# Altium PCB Ver1.PcbDoc
Units mm, origin at the board's own origin, x right, y up, seen from the top; angles counter-clockwise.
Board outline 50 x 50 mm, 2 copper layers (Top Layer, Bottom Layer); 33 components, 34 nets, 202 pads, 35 vias.
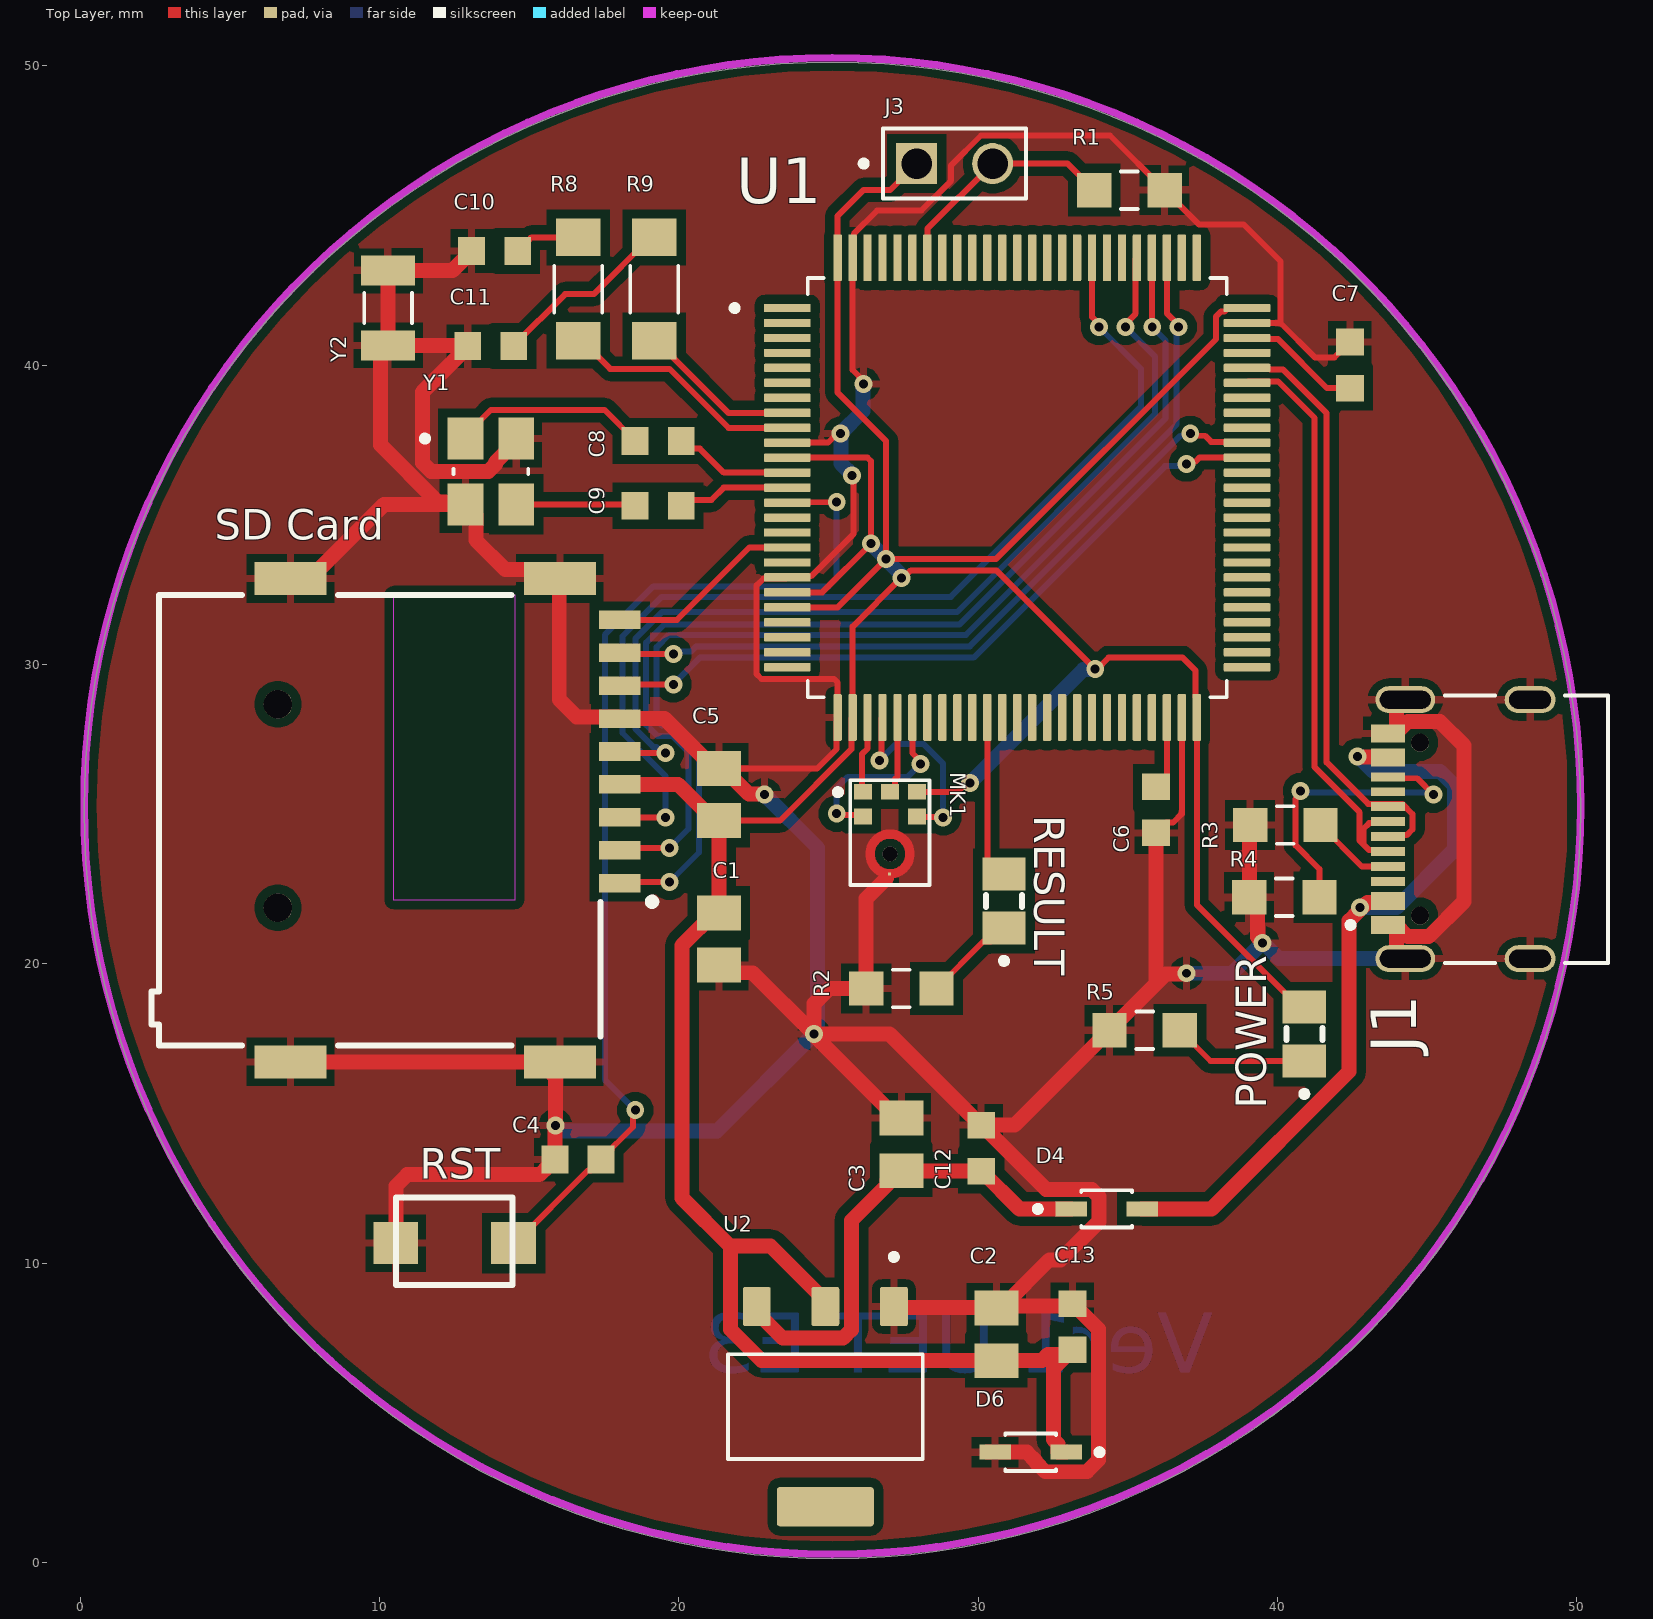
[diagram p0: Top Layer view]
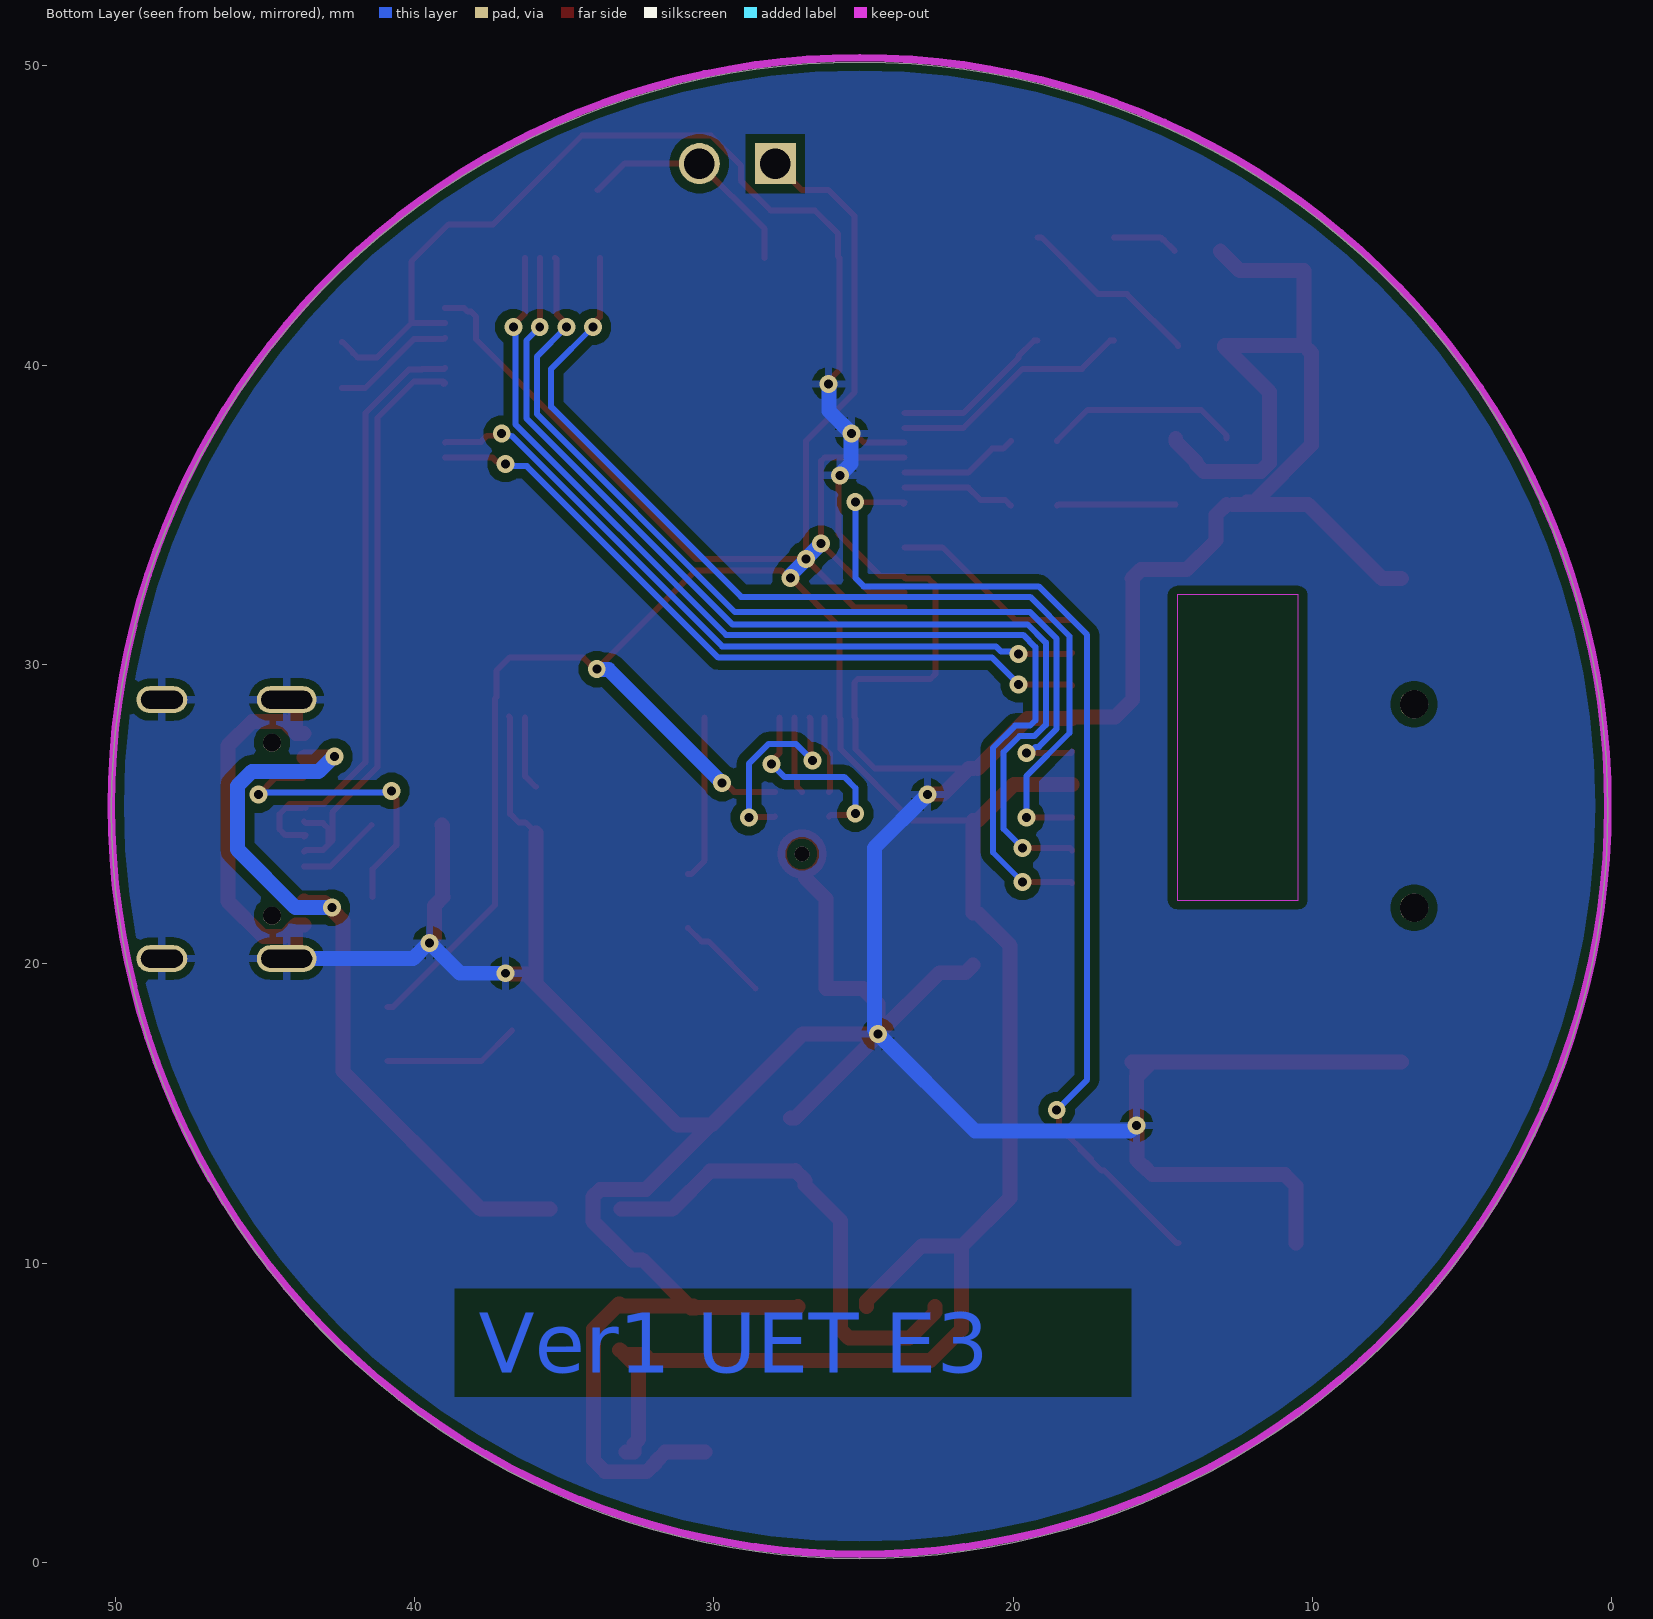
[diagram p1: Bottom Layer view, seen from below]
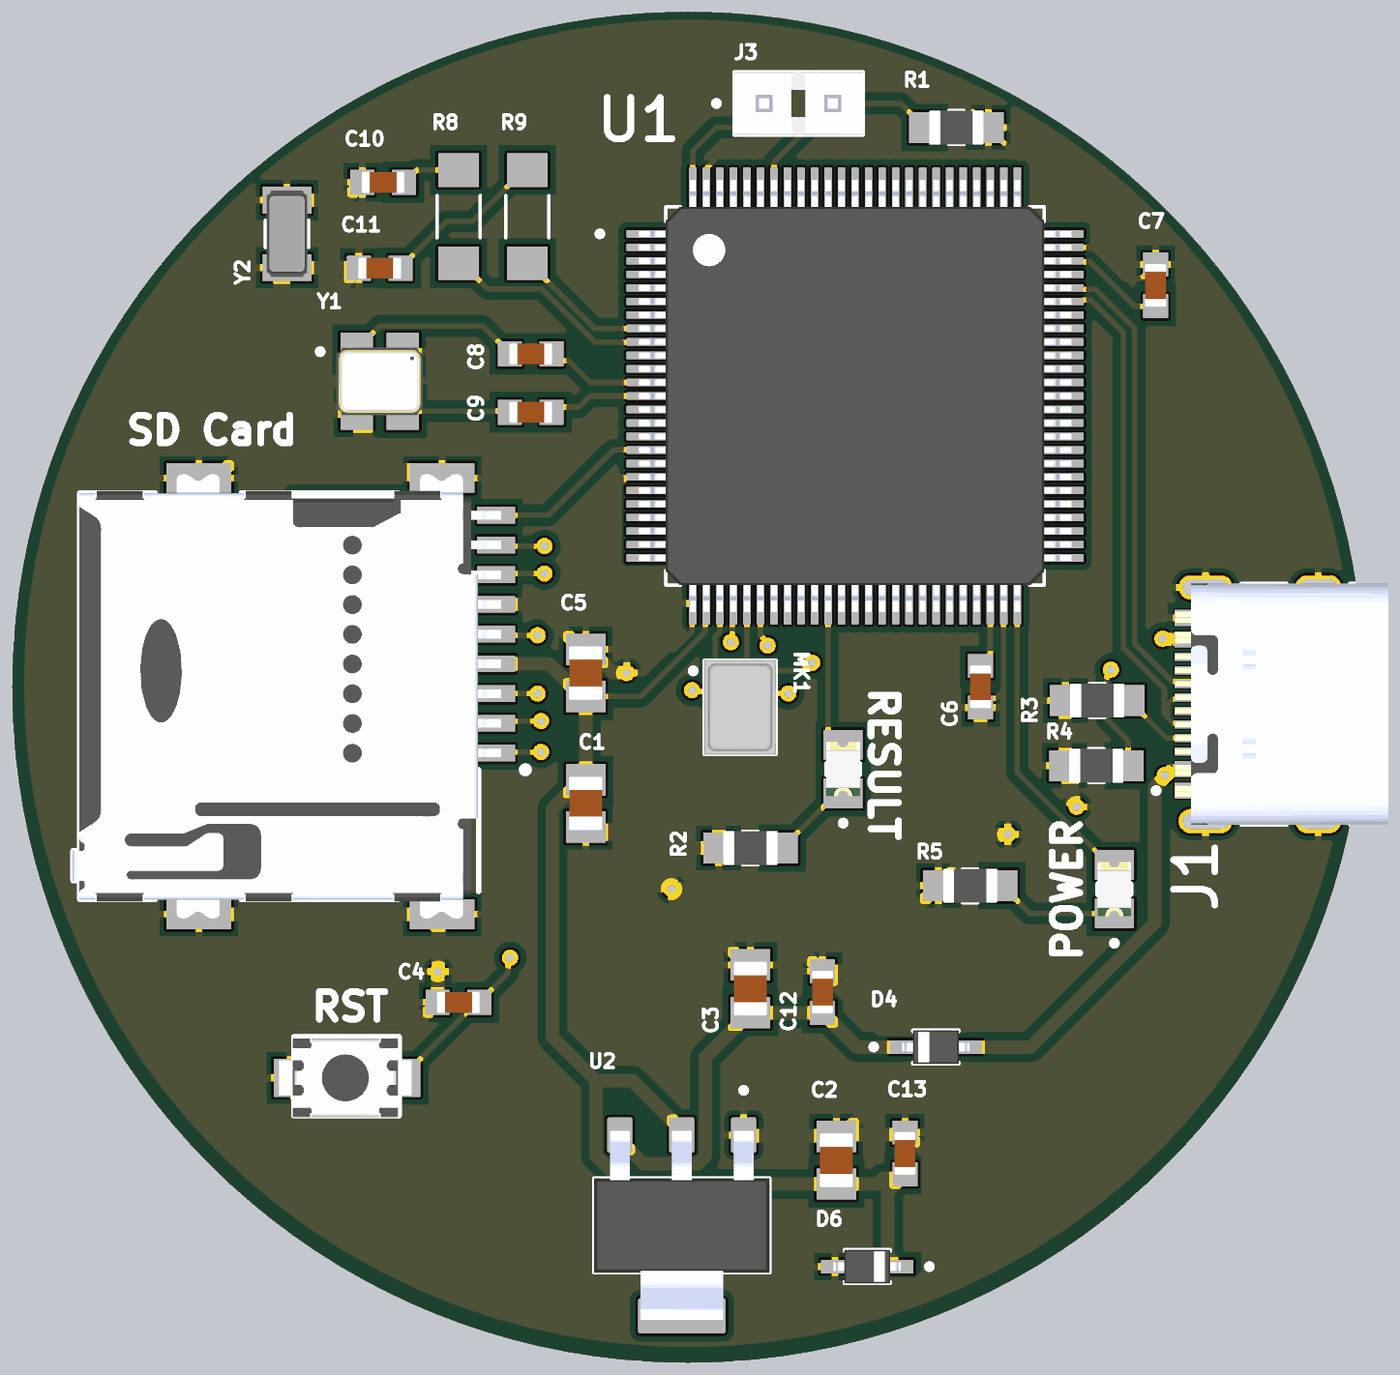
[diagram p2: 3D render of the assembled board from above, using the file's embedded part models]

## Layer stack, top to bottom
Top Solder: solder mask 0.0102, Solder Resist, Dk 3.5
Top Layer: signal copper 0.0356
Dielectric 1: dielectric 0.32, FR-4, Dk 4.8
Bottom Layer: signal copper 0.0356
Bottom Solder: solder mask 0.0102, Solder Resist, Dk 3.5

## Board outline
25.127,0.127 cw(c25.127,25.127) 0.127,25.127 cw(c25.127,25.127) 25.127,50.127 cw(c25.127,25.127) 50.127,25.127 cw(c25.127,25.127)

## Design rules (kind name [scope] priority, off if disabled: settings)
Clearance [All] p1: gap=0.3 ignorepadtopadclearanceinfootprint=TRUE
DiffPairsRouting [All] p1: maxlimit=0.254 minlimit=0.2 mostfreqgap=0.2 toplayer_minwidth=0.2 toplayer_maxwidth=0.2 toplayer_prefwidth=0.2 bottomlayer_minwidth=0.2 bottomlayer_maxwidth=0.2 bottomlayer_prefwidth=0.2 maxuncoupledlength=12.7
PolygonConnect [All] p1: connectstyle=Relief reliefconductorwidth=0.254 reliefentries=4 polygonreliefangle="90 Angle" airgapwidth=0.254
RoutingVias [All] p1: holewidth=0.3 width=0.6 viastyle="Through Hole" minholewidth=0.3 minwidth=0.6 maxholewidth=0.3 maxwidth=0.6
SMDNeckDown UI [IsPad and IsComponentPad and InComponent('U1')] p1: percent=80.000
SolderMaskExpansion [All] p1: expansion=0.102 istentingtop=FALSE
SupplyNets "Schematic Supply Nets_3" [InNet('+3.3V')] p1: voltage=0.000
SupplyNets "Schematic Supply Nets_2" [InNet('GND')] p2: voltage=0.000
SupplyNets "Schematic Supply Nets_1" [InNet('VBUS')] p3: voltage=0.000
SupplyNets "Schematic Supply Nets" [InNet('+5V')] p4: voltage=0.000
Width Width_Power [InNet('GND') or InNet('+5V') or InNet('+3.3V') or InNet('VBUS')] p1: maxlimit=0.5 minlimit=0.2 preferedwidth=0.2
Width [All] p2: maxlimit=0.2 minlimit=0.2 preferedwidth=0.2
29 further rules are at their usual default settings.

## Classes and differential pairs
differential pair USB: +USB_P -USB_N

## Components (designator, comment, footprint, x,y, rotation, side; value= is the part's Value field where it differs from the comment)
C1 "104" CAPC2012X145N 21.336,20.828 r90 top
C2 "106" CAPC2012X94N 30.607,7.62 r90 top
C3 "106" CAPC2012X94N 27.432,13.97 r90 top
C4 "104" CAPC1608X90N 16.629,13.462 r180 top
C5 "106" CAPC2012X145N 21.336,25.654 r270 top
C6 "2.2uF" CAPC1608X90N 35.941,25.146 r90 top
C7 "2.2uF" CAPC1608X90N 42.418,40.005 r270 top
C8 "20pF" CAPC1608X90N 19.304,37.465 r0 top
C9 "20pF" CAPC1608X90N 19.304,35.306 r180 top
C10 "104" CAPC1608X90N 13.843,43.815 r0 top
C11 "104" CAPC1608X90N 13.716,40.64 r0 top
C12 "104" CAPC1608X90N 30.099,13.843 r90 top
C13 "104" CAPC1608X90N 33.147,7.874 r90 top
D4 "B5819WS-TP" SOD2512X115N 34.29,11.811 r0 top
D6 "5V1" SOD2512X115N 31.75,3.683 r180 top
J1 "TYPE-C-31-M-12" HRO_TYPE-C-31-M-12 48.438,24.499 r90 top
J3 "3-644456-2" TE_3-644456-2 27.94,46.736 r0 top
MK1 "ICS-43434" MIC_ICS-43434 27.051,24.384 r0 top
POWER "597-5411-407F" LEDC2012X70N 40.894,17.653 r90 top
R1 "10k" RES_ERJU06J203V 35.052,45.847 r180 top
R2 "1K" RES_ERJU06J203V 27.432,19.177 r0 top
R3 "5.1k" RES_ERJU06J203V 40.259,24.638 r180 top
R4 "5.1k" RES_ERJU06J203V 40.227,22.225 r180 top
R5 "5.1k" RES_ERJU06J203V 35.56,17.78 r0 top
R8 "0 0.1%" RES_ERJU08F2201V 16.637,42.545 r90 top
R9 "0 0.1%" RES_ERJU08F2201V 19.177,42.545 r90 top
RESULT "597-5411-407F" LEDC2012X70N 30.861,22.098 r90 top
RST "Button" Button2PSMD 12.446,10.795 r180 top
"SD Card" "MEM2075-00-140-01-A" GCT_MEM2075-00-140-01-A 6.604,25.273 r270 top
U1 "STM32H743VIT6" QFP50P1600X1600X160-100N 31.302,35.909 r0 top
U2 "AMS1117-3.3" SOT229P700X180-4N 24.892,5.207 r270 top
Y1 "24MHz" XTAL_C3E-24.000-12-3030-R 13.716,36.449 r0 top
Y2 "32.7680K" XTAL_FC-135_32.7680KA-A0 10.287,41.91 r90 top

## Footprints (in the part's own frame and the unit in brackets; to place one, negate y for a bottom-side part, rotate by r counter-clockwise, add the part's x,y. Pads: shape width x height; smd on the part's side, far side on the other; paste and mask are expansions set on the pad)
Button2PSMD [mm]
  rect 1.5x1.4 smd: 2(-2.032,0.127) 3(1.905,0.127)
  silkscreen extent -1.99,-1.4 1.91,1.52, body extent -2.45,-1.32 2.45,1.58, height 2
CAPC1608X90N [mm]
  rect 0.89x0.93 smd: 1(-0.77,0) 2(0.77,0)
  body extent -0.8,-0.4 0.8,0.4, height 0.9
CAPC2012X94N [mm]
  rect 1.16x1.47 smd: 1(-0.88,0) 2(0.88,0)
  body extent -1,-0.63 1,0.63, height 0.94
CAPC2012X145N [mm]
  rect 1.17x1.47 smd: 1(-0.871,0) 2(0.871,0)
  body extent -1,-0.63 1,0.63, height 1.45
GCT_MEM2075-00-140-01-A [mm]
  rect 0.62x1.4 smd: P1(2.58,11.42) P2(1.48,11.42) P3(0.38,11.42) P4(-0.72,11.42) P5(-1.82,11.42) P6(-2.92,11.42) P7(-4.02,11.42) P8(-5.12,11.42) P9(-6.22,11.42)
  rect 1.1x2.4 smd: SH1(-7.6,0.42) SH2(-7.6,9.42) SH3(8.55,9.42) SH4(8.55,0.42)
  round 0.95 hole 0.95 unplated: ""(-3.4,0) ""(3.4,0)
  Keep-Out Layer region: 3.15,3.87 -7.05,3.87 -7.05,7.92 3.15,7.92
  silkscreen extent -7.05,-4.23 8,12.62, body extent -7.74,-4.25 8.7,11.6, height 1.45
HRO_TYPE-C-31-M-12 [mm]
  rect 0.6x1.14 smd mask+0.05: A1_B12(-3.2,4.75) A4_B9(-2.4,4.75) B1_A12(3.2,4.75) B4_A9(2.4,4.75)
  rect 0.3x1.14 smd mask+0.05: A5(-1.25,4.75) A6(-0.25,4.75) A7(0.25,4.75) A8(1.25,4.75) B5(1.75,4.75) B6(0.75,4.75) B7(-0.75,4.75) B8(-1.75,4.75)
  oval 0.9x2 hole 0.6 slot 1.7 at 90 deg: S1(-4.325,4.17) S2(4.325,4.17)
  oval 0.9x1.7 hole 0.6 slot 1.4 at 90 deg: S3(-4.325,0) S4(4.325,0)
  round 0.6 hole 0.6 unplated: ""(-2.89,3.68) ""(2.89,3.68)
  silkscreen extent -4.47,-2.6 4.47,6.1, body extent -4.47,-2.6 4.47,5.31, height 3.31
LEDC2012X70N [mm]
  rect 1.1x1.45 smd: A(0.9,0) C(-0.9,0)
  silkscreen extent -2.1,-0.6 0.2,0.6, body extent -1,-0.63 1,0.63, height 0.7
MIC_ICS-43434 [mm]
  rect 0.6x0.522 smd paste-0.05: 1(-0.9,1.361) 2(-0.9,0.539) 4(0.9,0.539) 5(0.9,1.361) 6(0,1.361)
  rect 0.1x0.1 smd paste-1 mask+0: 3(-0.015,-1.383)
  round 0.5 hole 0.5 unplated mask+0.665: ""(0,-0.713)
  Top Layer region: 250 vertices and 0 holes, not listed, extent -0.81,-1.53 0.81,0.1
  silkscreen extent -1.84,-1.75 1.33,1.75, body extent -1.33,-1.75 1.33,1.75, height 0.98
QFP50P1600X1600X160-100N [mm]
  rrect25% 1.56x0.28 smd: 1(-7.68,6) 2(-7.68,5.5) 3(-7.68,5) 4(-7.68,4.5) 5(-7.68,4) 6(-7.68,3.5) 7(-7.68,3) 8(-7.68,2.5) 9(-7.68,2) 10(-7.68,1.5) 11(-7.68,1) 12(-7.68,0.5) 13(-7.68,0) 14(-7.68,-0.5) 15(-7.68,-1) 16(-7.68,-1.5) 17(-7.68,-2) 18(-7.68,-2.5) 19(-7.68,-3) 20(-7.68,-3.5) 21(-7.68,-4) 22(-7.68,-4.5) 23(-7.68,-5) 24(-7.68,-5.5) 25(-7.68,-6) 51(7.68,-6) 52(7.68,-5.5) 53(7.68,-5) 54(7.68,-4.5) 55(7.68,-4) 56(7.68,-3.5) 57(7.68,-3) 58(7.68,-2.5) 59(7.68,-2) 60(7.68,-1.5) 61(7.68,-1) 62(7.68,-0.5) 63(7.68,0) 64(7.68,0.5) 65(7.68,1) 66(7.68,1.5) 67(7.68,2) 68(7.68,2.5) 69(7.68,3) 70(7.68,3.5) 71(7.68,4) 72(7.68,4.5) 73(7.68,5) 74(7.68,5.5) 75(7.68,6)
  rrect25% 0.28x1.56 smd: 26(-6,-7.68) 27(-5.5,-7.68) 28(-5,-7.68) 29(-4.5,-7.68) 30(-4,-7.68) 31(-3.5,-7.68) 32(-3,-7.68) 33(-2.5,-7.68) 34(-2,-7.68) 35(-1.5,-7.68) 36(-1,-7.68) 37(-0.5,-7.68) 38(0,-7.68) 39(0.5,-7.68) 40(1,-7.68) 41(1.5,-7.68) 42(2,-7.68) 43(2.5,-7.68) 44(3,-7.68) 45(3.5,-7.68) 46(4,-7.68) 47(4.5,-7.68) 48(5,-7.68) 49(5.5,-7.68) 50(6,-7.68) 76(6,7.68) 77(5.5,7.68) 78(5,7.68) 79(4.5,7.68) 80(4,7.68) 81(3.5,7.68) 82(3,7.68) 83(2.5,7.68) 84(2,7.68) 85(1.5,7.68) 86(1,7.68) 87(0.5,7.68) 88(0,7.68) 89(-0.5,7.68) 90(-1,7.68) 91(-1.5,7.68) 92(-2,7.68) 93(-2.5,7.68) 94(-3,7.68) 95(-3.5,7.68) 96(-4,7.68) 97(-4.5,7.68) 98(-5,7.68) 99(-5.5,7.68) 100(-6,7.68)
  silkscreen extent -9.54,-7 7,7, body extent -8,-8 8,8, height 1.6
RES_ERJU06J203V [mm]
  rect 1.15x1.15 smd: 1(-1.175,0) 2(1.175,0)
  silkscreen extent -0.28,-0.62 0.28,0.62, body extent -1,-0.63 1,0.63, height 0.6
RES_ERJU08F2201V [mm]
  rect 1.25x1.5 smd: 1(-1.725,0) 2(1.725,0)
  silkscreen extent -0.78,-0.8 0.78,0.8
SOD2512X115N [mm]
  rect 1.05x0.5 smd: A(1.185,0) C(-1.185,0)
  silkscreen extent -2.4,-0.62 0.85,0.62, body extent -1.25,-0.63 1.25,0.63, height 1.15
SOT229P700X180-4N [mm]
  rrect15% 1.31x0.93 smd: 1(-3.345,2.29) 2(-3.345,0) 3(-3.345,-2.29)
  rrect15% 1.31x3.24 smd: 4(3.345,0)
  silkscreen extent -5.1,-3.25 1.75,3.25, body extent -3.5,-3.25 3.5,3.25, height 1.8
TE_3-644456-2 [mm]
  rect 1.37x1.37 / inner round 1.37 / far side rect 1.37x1.37 hole 1.02: 1(0,0)
  round 1.37 hole 1.02: 2(2.54,0)
  silkscreen extent -1.87,-1.17 3.66,1.17, body extent -1.12,-1.17 3.66,1.17, height 10.03
XTAL_C3E-24.000-12-3030-R [mm]
  rect 1.2x1.4 smd: 1(-0.85,1.1) 2(-0.85,-1.1) 3(0.85,-1.1) 4(0.85,1.1)
  silkscreen extent -2.3,-0.08 1.25,1.2, body extent -1.25,-1.6 1.25,1.6, height 0.75
XTAL_FC-135_32.7680KA-A0 [mm]
  rect 1x1.8 smd: 1(-1.25,0) 2(1.25,0)
  silkscreen extent -0.5,-0.8 0.5,0.8, body extent -1.6,-0.75 1.6,0.75, height 0.9

## Part data
C1 C5: library part VJ0805A220KXCAP, "22 pF Â±10% 200V Ceramic Capacitor C0G, NP0 0805 (2012 Metric)", Package="2012 Vishay Vitramon", Check_prices=https://www.snapeda.com/parts/VJ0805A220KXCAP/Vishay/view-part/?ref=eda, MF="Vishay Vitramon", MP=VJ0805A220KXCAP, SnapEDA_Link=https://www.snapeda.com/parts/VJ0805A220KXCAP/Vishay/view-part/?ref=snap
C2 C3: library part 0805YC103J4T2A, "10000 pF Â±5% 16V Ceramic Capacitor X7R 0805 (2012 Metric)", Package="2012 AVX", Check_prices=https://www.snapeda.com/parts/0805YC103J4T2A/AVX/view-part/?ref=eda, MF=AVX, MP=0805YC103J4T2A, SnapEDA_Link=https://www.snapeda.com/parts/0805YC103J4T2A/AVX/view-part/?ref=snap
C4 C6 C7 C8 C9 C10 C11 C12 C13: library part CL10B104KB8NNNC, "0.1 ÂµF Â±10% 50V Ceramic Capacitor X7R 0603 (1608 Metric)", Package="1608-2 SAMSUNG", Check_prices=https://www.snapeda.com/parts/CL10B104KB8NNNC/Samsung/view-part/?ref=eda, MF="Samsung Electro-Mechanics", MP=CL10B104KB8NNNC, SnapEDA_Link=https://www.snapeda.com/parts/CL10B104KB8NNNC/Samsung/view-part/?ref=snap
D4: "Diode Schottky 40 V 1A Surface Mount SOD-323", Package="SOD-323 Taiwan Semiconductor Corporation", Check_prices=https://www.snapeda.com/parts/B5819WS-TP/Micro+Commercial/view-part/?ref=eda, MF="Micro Commercial", MP=B5819WS-TP, SnapEDA_Link=https://www.snapeda.com/parts/B5819WS-TP/Micro+Commercial/view-part/?ref=snap
D6: "Diode", Package="SOD-323 Taiwan Semiconductor Corporation", Check_prices=https://www.snapeda.com/parts/B5819WS-TP/Micro+Commercial/view-part/?ref=eda, MF="Micro Commercial", MP=B5819WS-TP, SnapEDA_Link=https://www.snapeda.com/parts/B5819WS-TP/Micro+Commercial/view-part/?ref=snap
J1: "USB Connectors 24 Receptacle 1 8.94*7.3mm RoHS", Package=Package, Check_prices=https://www.snapeda.com/parts/TYPE-C-31-M-12/HRO+Electronics+Co.%252C+Ltd./view-part/?ref=eda, MF="HRO Electronics Co., Ltd.", MP=TYPE-C-31-M-12, SnapEDA_Link=https://www.snapeda.com/parts/TYPE-C-31-M-12/HRO+Electronics+Co.%252C+Ltd./view-part/?ref=snap
J3: "HEADER ASSEMBLY, NARROW, MTA-100, 2 POSITION, STRAIGHT", Package=None, Check_prices=https://www.snapeda.com/parts/3-644456-2/TE+Connectivity+AMP+Connectors/view-part/?ref=eda, MF="TE Connectivity", MP=3-644456-2, SnapEDA_Link=https://www.snapeda.com/parts/3-644456-2/TE+Connectivity+AMP+Connectors/view-part/?ref=snap
MK1: "60 Hz ~ 20 kHz Digital, IÂ²S Microphone MEMS (Silicon) 1.65 V ~ 3.63 V Omnidirectional (-26 Â±1dB @ 94dB SPL) Solder Pads", Package="Custom Package TDK InvenSense", Availability="In Stock", Check_prices=https://www.snapeda.com/parts/ICS-43434/TDK+InvenSense/view-part/?ref=eda, MF="TDK InvenSense", MP=ICS-43434, Price=None, Purchase-URL=https://pricing.snapeda.com/search/part/ICS-43434/?ref=eda, SnapEDA_Link=https://www.snapeda.com/parts/ICS-43434/TDK+InvenSense/view-part/?ref=snap
POWER RESULT: "SMD LED 0805 YG 7", Package="0805 Dialight", Check_prices=https://www.snapeda.com/parts/597-5411-407F/Dialight/view-part/?ref=eda, MF=Dialight, MP=597-5411-407F, SnapEDA_Link=https://www.snapeda.com/parts/597-5411-407F/Dialight/view-part/?ref=snap
R1 R2 R3 R4 R5: library part R0805, "R0805", Package=None, Availability=Unavailable, MP=ERJU06J203V, Price=None
R8 R9: library part ERJU08F2201V, "0Ohm 0.1%", Package=None, Availability=Unavailable, MP=ERJU08F2201V, Price=None
RST: library part Component_1
"SD Card": "9 (8 + 1) Position Card Connector microSD Surface Mount, Right Angle Gold", Package=None, Check_prices=https://www.snapeda.com/parts/MEM2075-00-140-01-A/Global+Connector+Technology/view-part/?ref=eda, MF="Global Connector Technology", MP=MEM2075-00-140-01-A, SnapEDA_Link=https://www.snapeda.com/parts/MEM2075-00-140-01-A/Global+Connector+Technology/view-part/?ref=snap
U1: "ARMÂ® CortexÂ®-M7 STM32H7 Microcontroller IC 32-Bit Single-Core 480MHz 2MB (2M x 8) FLASH 100-LQFP (14x14)", Package="LQFP-100 STMicroelectronics", Check_prices=https://www.snapeda.com/parts/STM32H743VIT6/STMicroelectronics/view-part/?ref=eda, MF=STMicroelectronics, MP=STM32H743VIT6, SnapEDA_Link=https://www.snapeda.com/parts/STM32H743VIT6/STMicroelectronics/view-part/?ref=snap
U2: "Sot223/Pkg 1-Amp 3.3-Volt Low Drop Out Voltage Regulatator", Package="SOT-223 Seeed Technology", Check_prices=https://www.snapeda.com/parts/AMS1117-3.3/Advanced+Monolithic+Systems/view-part/?ref=eda, MF="Advanced Monolithic Systems", MP=AMS1117-3.3, SnapEDA_Link=https://www.snapeda.com/parts/AMS1117-3.3/Advanced+Monolithic+Systems/view-part/?ref=snap
Y1: library part C3E-24.000-12-3030-R, Package=None, Availability=Unavailable, MP=C3E-24.000-12-3030-R, Price=None
Y2: library part FC-135_32.7680KA-A0, "32.768 kHz Â±20ppm Crystal 12.5pF 70 kOhms 2-SMD, No Lead", Package="SMD-2 Epson", Check_prices=https://www.snapeda.com/parts/FC-135%2032.7680KA-A0/EPSON/view-part/?ref=eda, MF=EPSON, MP="FC-135 32.7680KA-A0", SnapEDA_Link=https://www.snapeda.com/parts/FC-135%2032.7680KA-A0/EPSON/view-part/?ref=snap

## Via types
v1: diameter 0.6, hole 0.3, Top Layer to Bottom Layer, 35 vias

## Nets (pads, with @x,y where several pads share a name; then routed paths per layer and width w, separated by ;. In a path a pad name is that pad's centre, name@x,y a point inside that pad or via, vN(x,y) a via of type N, cw(c..) or ccw(c..) an arc to the next point about the centre after c; other vN are vias at no path point)
+3.3V: "SD Card.P4" C1.2 C2.1 C5.2 C13.1 D6.C J3.1 MK1.5 POWER.A U1.11 U1.20 U1.21 U1.27 U1.50 U1.75 U1.100 U2.2 | length 132
  Top Layer w0.2: C5.2 23.376,24.783 25.762,27.169 25.762,28.189 U1.27 25.802,31.263 v1(27.432,32.893) 27.495,32.893 27.749,33.147 30.607,33.147 v1(33.909,29.845) 33.972,29.845 34.353,30.226 36.83,30.226 37.262,29.794 37.262,28.909 37.302,28.869 37.302,21.97 40.719,18.553 POWER.A ; U1.21 25.305,31.909 v1(26.924,33.528) ; U1.20 24.789,32.409 v1(26.416,34.036) 26.416,36.792 26.299,36.909 U1.11 ; J3.1 27.051,45.847 26.162,45.847 25.302,44.987 U1.100 25.302,39.084 26.924,37.462 v1(26.924,33.528) ; MK1.5 29.32,25.745 29.61,26.035 v1(29.718,26.035) ; U1.75 38.342,41.909 38.234,41.801 38.185,41.801 38.118,41.801 37.95,41.633 37.95,40.877 30.601,33.528 v1(26.924,33.528)
  Top Layer w0.5: 18.024,25.993 19.976,25.993 21.186,24.783 C5.2 C1.2 21.186,21.699 20.105,20.618 20.105,12.18 21.716,10.569 ; U2.2 24.892,8.742 23.065,10.569 21.716,10.569 ; D6.C 32.66,3.683 32.66,3.958 32.512,4.106 32.512,6.486 32.932,6.906 32.932,6.909 C13.1@32.972,6.949 ; C13.1 33.127,7.104 C13.1@32.972,6.949 ; 21.716,10.569 21.716,7.789 22.766,6.74 C2.1 32.123,6.74 32.332,6.949 C13.1@32.972,6.949
  Bottom Layer w0.5: v1(26.416,34.036) v1(26.924,33.528) 26.924,33.501 27.413,33.012 27.413,32.912 v1(27.432,32.893) ; v1(29.718,26.035) 33.509,29.826 33.89,29.826 v1(33.909,29.845)
+5V: C3.1 C12.1 D4.C U2.3 | length 16.1
  Top Layer w0.5: U2.3 22.602,8.362 23.469,7.495 25.483,7.495 25.759,7.771 25.759,11.417 26.947,12.605 26.947,12.76 27.277,13.09 27.285,13.082 30.091,13.082 C12.1 30.119,13.073 31.381,11.811 D4.C
BOOT0: J3.2 R1.2 U1.94 | length 7.8
  Top Layer w0.2: U1.94 28.302,44.558 J3.2 32.988,46.736 R1.2
GND: "SD Card.P6" "SD Card.SH1" "SD Card.SH2" "SD Card.SH3" "SD Card.SH4" C1.1 C2.2 C3.2 C4.2 C5.1 C6.1 C7.1 C10.1 C11.1 C12.2 C13.2 D6.A J1.A1_B12 J1.B1_A12 J1.S1 J1.S2 J1.S3 J1.S4 MK1.3 R1.1 R2.1 R3.2 R4.2 R5.1 RST.3 U1.10 U1.19 U1.26 U1.49 U1.74 U1.99 U2.1 Y1.2 Y1.4 Y2.1 Y2.2 | length 231.1
  Top Layer w0.2: C5.1@21.486,26.525 24.62,26.525 25.273,27.178 25.273,28.2 U1.26 25.302,29.399 25.185,29.517 22.758,29.517 22.59,29.685 22.59,32.633 22.826,32.869 23.582,32.869 U1.19 23.662,32.949 24.418,32.949 25.825,34.356 25.825,36.278 v1(25.781,36.322) ; U1.10 24.982,37.409 25.292,37.719 v1(25.4,37.719) ; v1(26.162,39.37) 26.162,39.478 25.802,39.838 U1.99 25.842,43.629 25.842,44.385 26.623,45.166 28.097,45.166 29.094,46.163 29.094,46.676 30.092,47.673 34.401,47.673 R1.1 37.37,44.704 38.862,44.704 40.097,43.469 40.097,41.409 ; C6.1 36.286,24.721 36.514,24.721 36.802,25.009 U1.49 U1.49@36.842,28.269 ; U1.74 40.097,41.409 ; C7.1 42.398,40.775 42.053,40.43 42.053,40.41 41.902,40.259 41.247,40.259 40.097,41.409
  Top Layer w0.5: 7.024,16.723 15.374,16.723 ; 7.024,32.873 7.674,32.873 10.15,35.349 Y1.2@12.653,35.349 ; Y2.1 Y2.2 12.438,43.16 13.073,43.795 C10.1 ; RST.3 10.541,12.573 10.922,12.954 15.351,12.954 15.644,13.247 15.664,13.247 15.859,13.442 C4.2 v1@15.859,14.605 ; 12.192,35.433 11.938,35.433 10.033,37.338 10.033,40.41 10.273,40.65 12.936,40.65 12.936,40.61 11.43,39.104 11.43,36.74 11.723,36.447 13.633,36.447 13.868,36.682 13.868,36.751 14.566,37.449 Y1.4 ; Y1.2 13.216,34.999 13.216,34.155 14.198,33.173 15.724,33.173 16.024,32.873 16.002,32.851 16.002,28.829 16.578,28.253 17.964,28.253 18.024,28.193 19.518,28.193 C5.1@21.186,26.525 ; 15.859,16.222 15.859,16.558 16.024,16.723 15.374,16.723 ; v1(15.875,14.605) 15.875,16.222 15.374,16.723 ; C1.1 21.591,19.702 22.462,19.702 v1(24.511,17.653) ; C5.1 21.486,26.525 22.338,25.673 22.841,25.673 v1(22.86,25.654) ; 26.936,22.861 26.257,22.181 R2.1 25.019,19.177 24.511,18.669 v1(24.511,17.653) ; U2.1 27.208,8.526 30.581,8.526 C2.2 ; C3.2 27.277,14.85 24.53,17.597 24.53,17.634 v1(24.511,17.653) ; D6.A@30.29,3.683 D6.A 31.623,3.683 31.933,3.373 31.933,3.341 32.243,3.031 33.627,3.031 34.014,3.418 34.014,7.797 33.167,8.644 C13.2 33.075,8.572 C2.2@30.834,8.572 ; C6.1 35.941,19.336 ; v1(36.957,19.685) 36.938,19.666 36.271,19.666 35.941,19.336 ; R3.2 39.068,24.622 39.068,22.241 R4.2 39.325,21.952 39.325,20.9 39.497,20.728 v1(39.497,20.701) ; J1.A1_B12 J1.A1_B12@43.928,21.299 ; J1.B1_A12 J1.B1_A12@43.928,27.699 ; J1.S1 44.163,20.174 43.978,20.359 43.978,21.249 J1.A1_B12@43.928,21.299 ; J1.S2 44.163,28.824 43.978,28.639 43.978,27.749 J1.B1_A12@43.928,27.699 ; v1(24.511,17.653) 27.039,17.653 30.079,14.613 C12.2 C12.2@30.119,14.613 ; C12.2@30.119,14.613 31.218,14.613 R5.1 35.941,19.336 ; C12.2@30.119,14.613 32.269,12.463 33.797,12.463 34.032,12.228 34.032,11.394 32.75,10.112 32.374,10.112 C2.2@30.834,8.572 ; C2.2 30.762,8.5 C2.2@30.834,8.572 ; C2.2 30.679,8.572 C2.2@30.834,8.572 ; J1.A1_B12@43.928,21.299 43.958,21.299 44.35,20.907 45.049,20.907 46.228,22.086 46.228,27.293 45.43,28.091 44.35,28.091 43.958,27.699 J1.B1_A12@43.928,27.699
  Bottom Layer w0.5: v1(15.875,14.605) 15.902,14.605 16.096,14.411 21.269,14.411 v1(24.511,17.653) 24.511,17.68 24.638,17.807 24.638,23.876 v1(22.86,25.654) ; v1(25.781,36.322) 25.781,36.349 25.419,36.711 25.419,37.7 v1(25.4,37.719) 26.143,38.462 26.143,39.351 v1(26.162,39.37) ; v1(36.957,19.685) 38.481,19.685 v1(39.497,20.701) 39.524,20.701 40.051,20.174 J1.S1
LedResult: RESULT.A U1.36 | length 5.5
  Top Layer w0.2: U1.36 30.302,23.448 30.752,22.998 RESULT.A
LR: MK1.2 U1.31 | length 6.6
  Top Layer w0.2: v1(25.273,25.019) 25.321,24.971 26.103,24.971 MK1.2 ; U1.31 27.802,27.043 28.067,26.778 v1(28.067,26.67)
  Bottom Layer w0.2: v1(25.273,25.019) 25.273,25.873 25.644,26.245 27.642,26.245 v1(28.067,26.67)
NetC4_1: C4.1 RST.2 U1.14 | length 35.8
  Top Layer w0.2: RST.2 14.528,10.668 16.957,13.097 17.054,13.097 C4.1@17.744,13.787 ; C4.1 17.399,13.482 18.465,14.548 18.465,15.036 v1(18.542,15.113) ; U1.14@23.662,35.369 U1.14 23.634,35.421 25.261,35.421 v1(25.273,35.433)
  Bottom Layer w0.2: v1(18.542,15.113) 17.526,16.129 17.526,30.988 19.148,32.61 24.99,32.61 25.273,32.893 v1(25.273,35.433)
NetC8_1: C8.1 Y1.1 | length 6.6
  Top Layer w0.2: Y1.1 12.866,37.649 13.718,38.501 17.518,38.501 18.534,37.485 C8.1
NetC9_2: C9.2 Y1.3 | length 4
  Top Layer w0.2: Y1.3 18.491,35.349 C9.2
NetC10_2: C10.2 R8.2 | length 2.2
  Top Layer w0.2: C10.2 14.613,43.835 14.958,44.18 14.978,44.18 15.068,44.27 R8.2
NetC11_2: C11.2 R9.2 | length 6.2
  Top Layer w0.2: C11.2 14.486,40.66 16.201,42.375 17.157,42.375 19.052,44.27 R9.2
NetPOWER_C: POWER.C R5.2 | length 4.6
  Top Layer w0.2: R5.2 37.762,16.753 POWER.C
NetR2_2: R2.2 RESULT.C | length 3.1
  Top Layer w0.2: R2.2 30.178,20.748 30.411,20.748 RESULT.C
PC15-OSC32-IN: R9.1 U1.8 | length 5.5
  Top Layer w0.2: R9.1 19.302,40.82 19.827,40.295 19.827,40.236 21.654,38.409 U1.8
PC15-OSC32-OUT: R8.1 U1.9 | length 8.2
  Top Layer w0.2: R8.1 16.762,40.82 17.704,39.878 19.687,39.878 21.656,37.909 U1.9
PH0-OSC-IN: C8.2 U1.12 | length 4
  Top Layer w0.2: C8.2 20.329,37.21 20.702,37.21 21.503,36.409 U1.12
PH1-OSC_OUT: C9.1 U1.13 | length 3.8
  Top Layer w0.2: C9.1 20.265,35.497 21.083,35.497 21.495,35.909 U1.13
SCK: MK1.4 U1.29 | length 6.8
  Top Layer w0.2: v1(26.708,26.797) 26.762,26.851 26.762,28.189 U1.29 ; MK1.4 27.967,24.907 28.814,24.907 v1(28.829,24.892)
  Bottom Layer w0.2: v1(26.708,26.797) 27.261,27.349 28.169,27.349 28.829,26.689 v1(28.829,24.892)
SDI: MK1.6 U1.30 | length 2.6
  Top Layer w0.2: MK1.6 27.212,25.906 27.212,26.17 27.302,26.26 U1.30
SDIO_CLK: "SD Card.P5" U1.80 | length 32.2
  Top Layer w0.2: 18.024,27.093 18.066,27.051 v1(19.558,27.051) ; v1(34.925,41.275) 34.925,41.383 35.262,41.72 35.262,43.549 U1.80
  Bottom Layer w0.2: v1(19.558,27.051) 19.45,27.051 19.25,27.251 19.142,27.251 18.555,27.839 18.555,30.874 19.431,31.75 29.289,31.75 35.912,38.373 35.912,40.288 v1(34.925,41.275)
SDIO_CMD: "SD Card.P3" U1.83 | length 34.3
  Top Layer w0.2: 18.024,24.893 18.025,24.892 v1(19.558,24.892) ; U1.83 33.802,41.617 34.036,41.383 v1(34.036,41.275)
  Bottom Layer w0.2: v1(19.558,24.892) 19.558,26.27 18.117,27.711 18.117,30.944 19.431,32.258 29.083,32.258 35.433,38.608 35.433,39.878 v1(34.036,41.275)
SDIO_D0: "SD Card.P7" U1.65 | length 24.1
  Top Layer w0.2: 18.024,29.293 18.068,29.337 v1(19.812,29.337) ; v1(36.957,36.703) 37.034,36.78 37.259,36.78 37.389,36.909 U1.65
  Bottom Layer w0.2: v1(19.812,29.337) 20.701,30.226 29.845,30.226 36.245,36.626 36.88,36.626 v1(36.957,36.703)
SDIO_D1: "SD Card.P8" U1.66 | length 24.2
  Top Layer w0.2: 18.024,30.393 18.064,30.353 v1(19.812,30.353) ; v1(37.084,37.719) 37.161,37.642 37.579,37.642 37.784,37.437 38.954,37.437 U1.66
  Bottom Layer w0.2: v1(19.812,30.353) 19.889,30.43 20.397,30.43 20.574,30.607 29.718,30.607 36.753,37.642 37.007,37.642 v1(37.084,37.719)
SDIO_D2: "SD Card.P1" U1.78 | length 37
  Top Layer w0.2: 18.024,22.693 18.064,22.733 v1(19.685,22.733) ; U1.78 36.302,41.732 36.693,41.341 v1(36.693,41.275)
  Bottom Layer w0.2: v1(19.685,22.733) 20.672,23.72 20.672,27.216 19.933,27.956 19.434,27.956 19.26,28.131 19.26,30.582 19.666,30.988 29.591,30.988 36.617,38.014 36.617,41.198 v1(36.693,41.275)
SDIO_D3: "SD Card.P2" U1.79 | length 35.7
  Top Layer w0.2: 18.024,23.793 18.107,23.876 v1(19.685,23.876) ; U1.79 35.808,43.583 35.808,41.281 v1(35.814,41.275)
  Bottom Layer w0.2: v1(19.685,23.876) 20.32,24.511 20.32,27.07 19.787,27.603 19.288,27.603 18.907,27.985 18.907,30.728 19.52,31.34 29.378,31.34 36.264,38.227 36.264,40.825 v1(35.814,41.275)
SDIO_NCD: "SD Card.P9" U1.17 | length 6.6
  Top Layer w0.2: 18.024,31.493 19.936,31.493 22.352,33.909 U1.17
USB_CC1: J1.A5 R3.1 | length 2.8
  Top Layer w0.2: R3.1 42.823,23.249 J1.A5
USB_CC2: J1.B5 R4.1 | length 10.2
  Top Layer w0.2: v1(40.767,25.781) 40.767,25.673 40.607,25.512 40.607,23.958 41.402,23.163 R4.1 ; J1.B5 43.737,26.2 44.666,26.2 v1(45.212,25.654)
  Bottom Layer w0.2: v1(40.767,25.781) 40.831,25.717 45.148,25.717 v1(45.212,25.654)
USB_N: J1.A7 J1.B7 U1.70 | length 20.2
  Top Layer w0.2: U1.70@39.022,39.369 U1.70 39.022,39.449 39.742,39.449 39.752,39.459 40.014,39.459 41.239,38.235 41.239,26.568 42.746,25.061 42.746,24.114 42.866,23.994 ; J1.A7 43.638,24.699 43.061,24.699 42.866,24.504 42.866,23.994 ; 42.866,23.994 43.061,23.799 J1.B7@43.638,23.799 ; J1.B7@43.638,23.799 J1.B7 J1.B7@43.638,23.799
USB_P: J1.A6 J1.B6 U1.71 | length 20.8
  Top Layer w0.2: U1.71@39.021,39.87 U1.71 39.022,39.869 39.742,39.869 39.752,39.859 40.18,39.859 41.639,38.4 41.639,26.734 43.026,25.347 44.167,25.347 44.51,25.004 44.51,24.494 44.315,24.299 43.638,24.299 J1.A6 ; J1.B6@43.638,25.199 J1.B6 43.738,25.199 44.315,25.199
VBUS: D4.A J1.A4_B9 J1.B4_A9 | length 26.3
  Top Layer w0.5: D4.A 37.796,11.811 42.392,16.407 42.392,21.442 v1@42.696,21.746 ; v1(42.672,26.924) 42.684,26.912 43.676,26.912 J1.B4_A9 ; v1(42.76,21.875) 42.76,21.81 v1@42.696,21.746 ; J1.A4_B9 43.638,22.049 42.999,22.049 v1@42.696,21.746
  Bottom Layer w0.5: v1(42.672,26.924) 42.699,26.924 43.198,26.425 45.434,26.425 45.914,25.945 45.914,23.816 43.973,21.875 v1(42.76,21.875)
VCAP1: C6.2 U1.48 | length 2.5
  Top Layer w0.2: C6.2 35.957,25.916 36.302,26.261 U1.48
VCAP2: C7.2 U1.73 | length 4.1
  Top Layer w0.2: U1.73 39.022,40.869 40.019,40.869 41.653,39.235 C7.2
WS: MK1.1 U1.28 | length 2.6
  Top Layer w0.2: MK1.1 26.123,25.772 26.123,27.012 26.302,27.191 U1.28
pads on no net: "SD Card." J1. J1.A8 J1.B8 MK1. U1.1 U1.2 U1.3 U1.4 U1.5 U1.6 U1.7 U1.15 U1.16 U1.18 U1.22 U1.23 U1.24 U1.25 U1.32 U1.33 U1.34 U1.35 U1.37 U1.38 U1.39 U1.40 U1.41 U1.42 U1.43 U1.44 U1.45 U1.46 U1.47 U1.51 U1.52 U1.53 U1.54 U1.55 U1.56 U1.57 U1.58 U1.59 U1.60 U1.61 U1.62 U1.63 U1.64 U1.67 U1.68 U1.69 U1.72 U1.76 U1.77 U1.81 U1.82 U1.84 U1.85 U1.86 U1.87 U1.88 U1.89 U1.90 U1.91 U1.92 U1.93 U1.95 U1.96 U1.97 U1.98 U2.4

## Polygon pours and split planes (outlines as drawn)
GND on Top Layer "GND_L01_P000" (solid, remove dead copper, pour order 0): 49.657,0 49.657,51.435 48.895,52.197 48.768,52.07 0,52.07 0,0
GND on Bottom Layer "GND_L02_P002" (solid, remove dead copper, pour order 2): 50.8,0 50.8,53.848 47.879,56.769 47.371,56.261 0,56.261 0,0

## Keep-outs
Keep-Out Layer:
  circle w0.254: c25.127,25.273 r25

## Other copper
Bottom Layer:
  text "Ver1 UET E3" at 37.854,6.342 h2